# Altium PCB uTCA_MCH_PCB1_template.PcbDoc
Units mm, origin at the board's own origin, x right, y up, seen from the top; angles counter-clockwise.
Board outline 182.75 x 75.8 mm, 2 copper layers (Top Layer, Bottom Layer); 6 components, 0 nets, 302 pads, 0 vias.
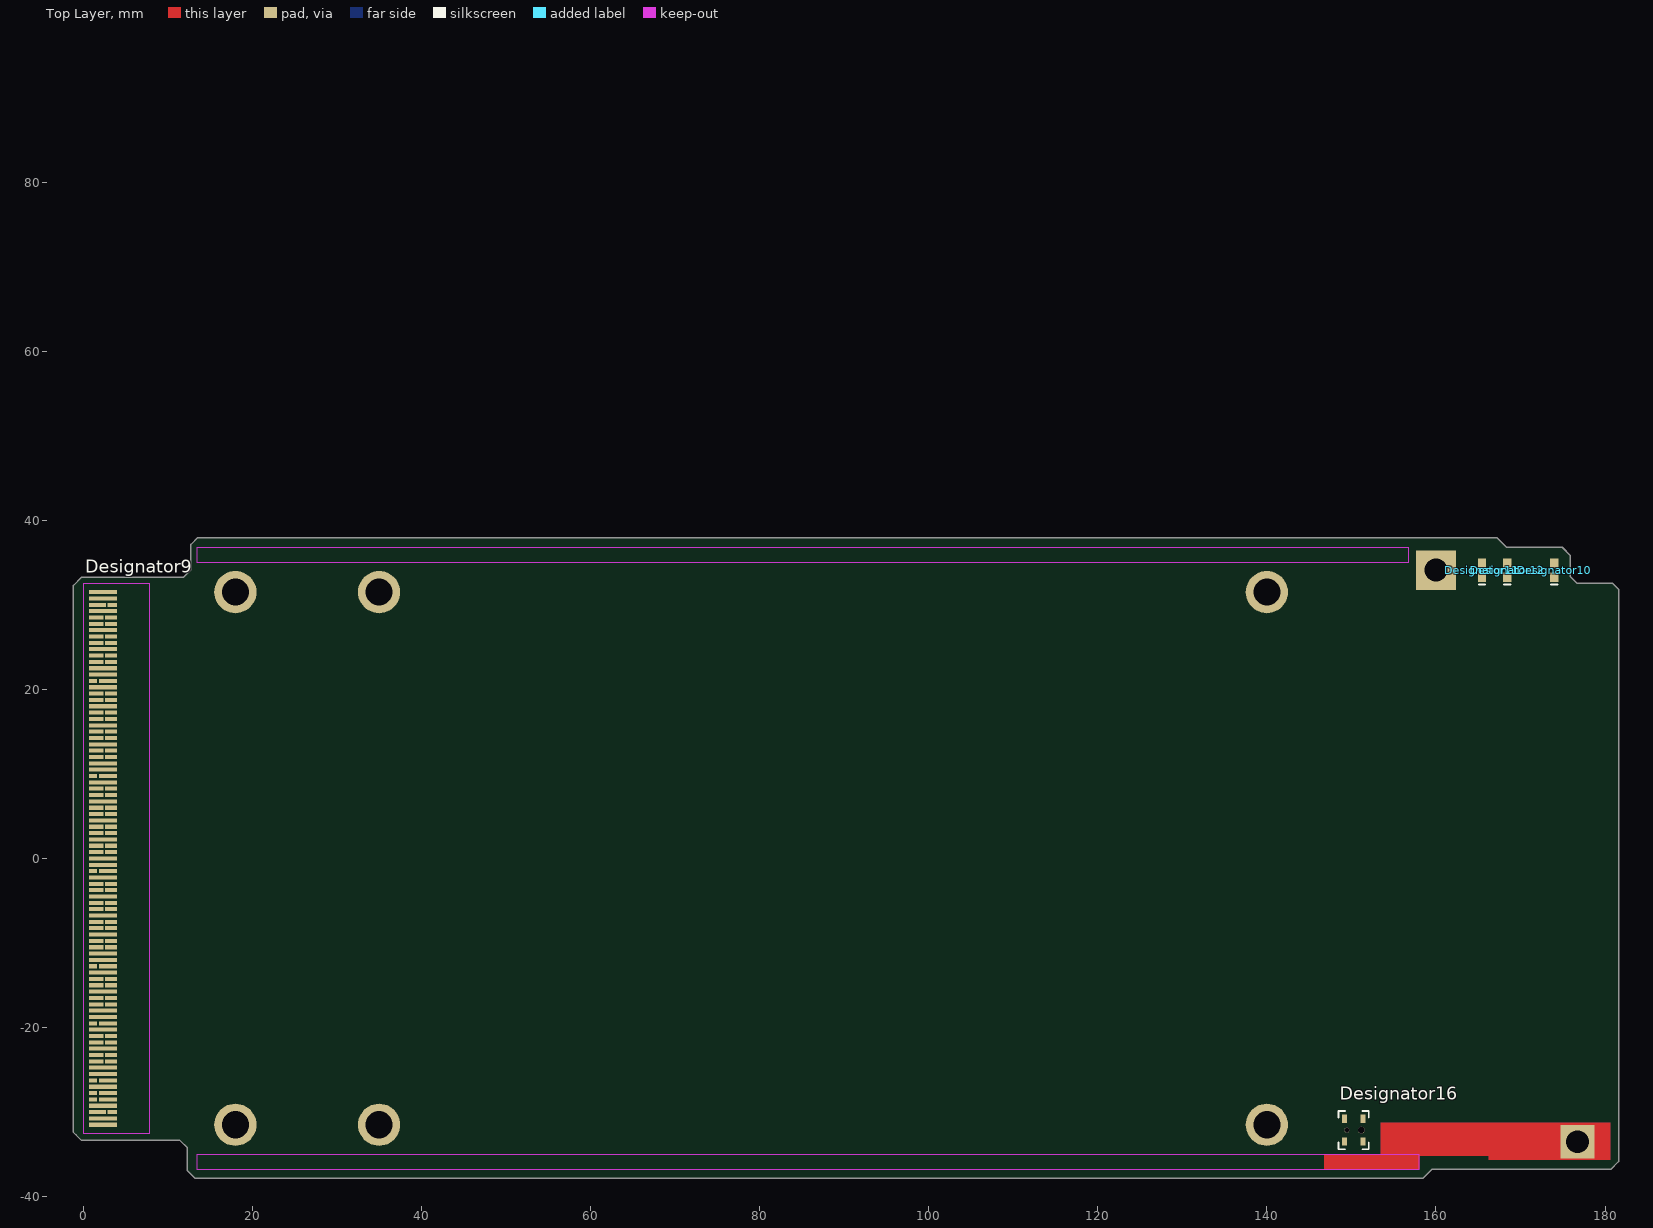
[diagram p0: Top Layer view]
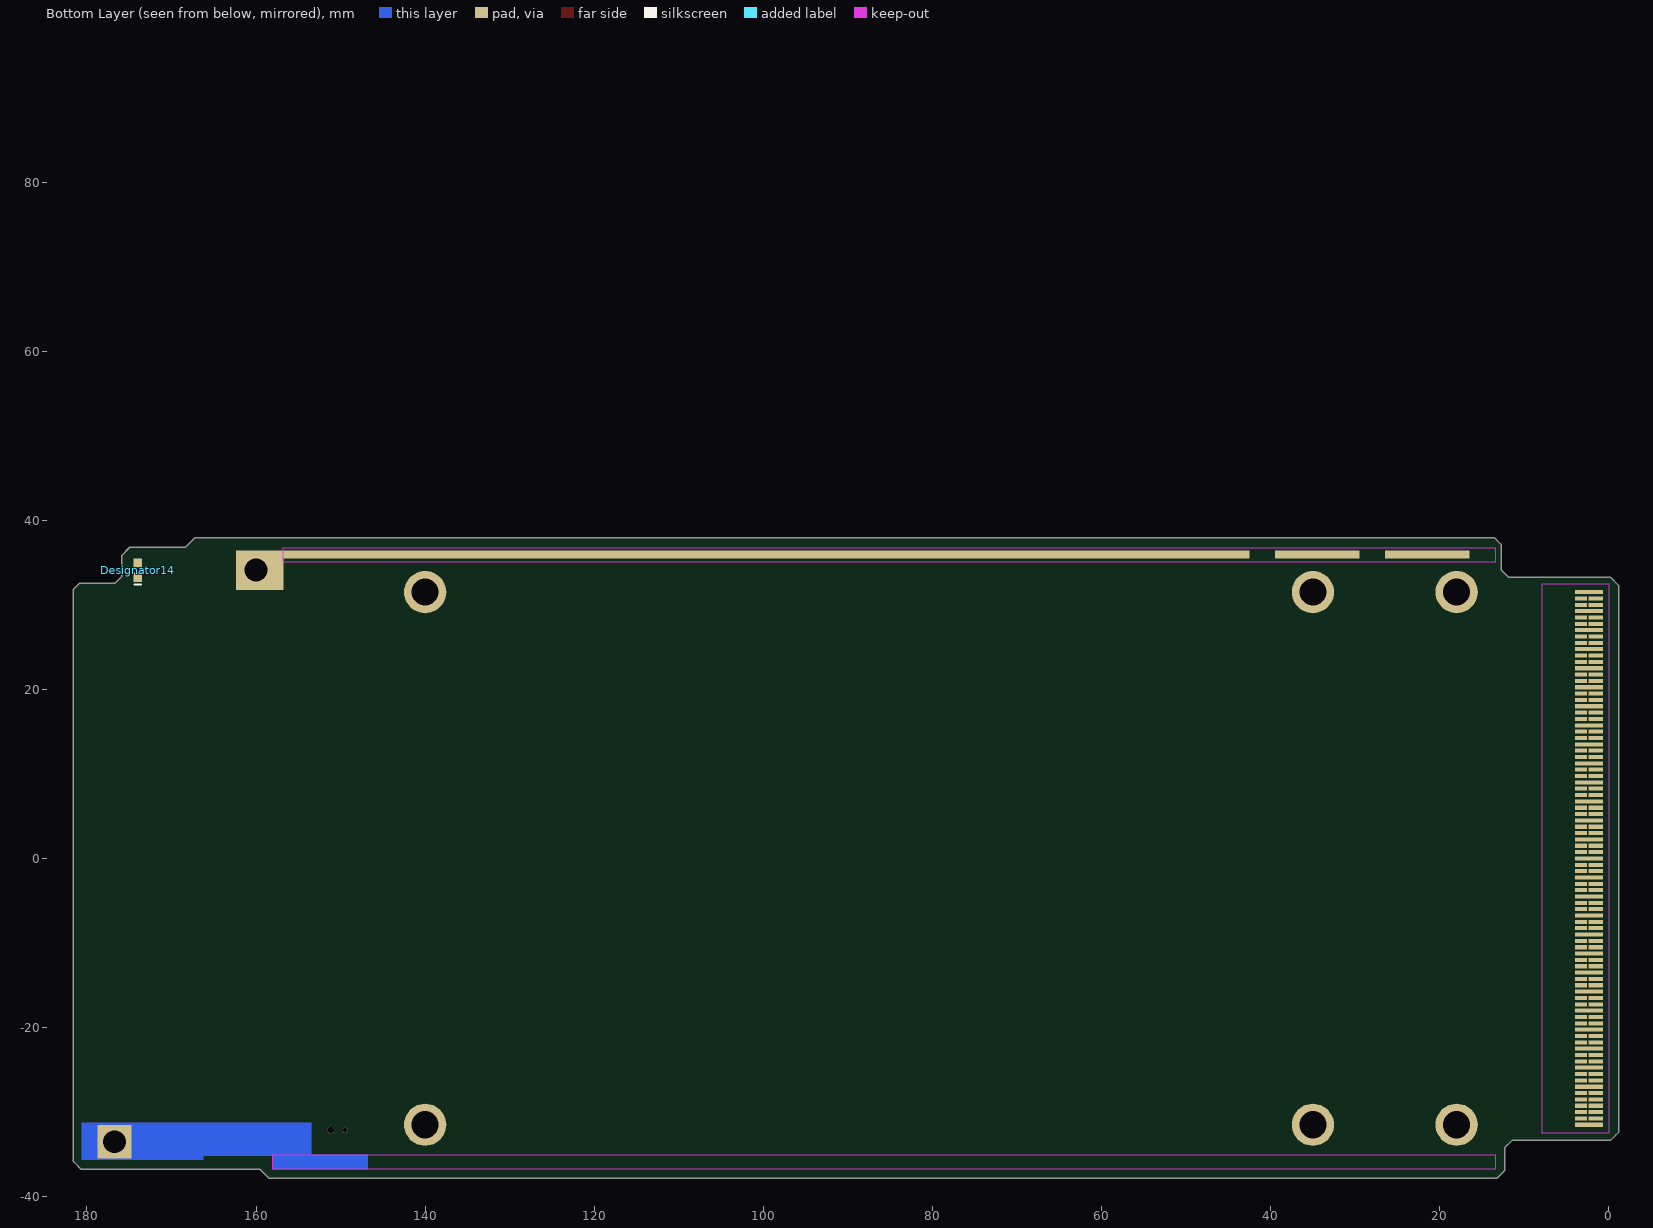
[diagram p1: Bottom Layer view, seen from below]

## Layer stack, top to bottom
Top Layer: signal copper 0.0356
Dielectric: dielectric 0.32, FR-4, Dk 4.8
Bottom Layer: signal copper 0.0356

## Board outline
-1.15,32.3 -0.2,33.25 11.6,33.25 11.85,33.25 12.75,34.15 12.75,37.15 13.55,37.95 167.2,37.95 168.35,36.8 174.95,36.8 175.9,35.85 175.9,33.35 176.7,32.55 180.9,32.55 181.6,31.85 181.6,-35.85 180.7,-36.75 159.55,-36.75 158.45,-37.85 13.25,-37.85 12.3,-36.9 12.3,-34.2 11.45,-33.35 -0.2,-33.35 -0.85,-32.7 -1.15,-32.4 -1.15,32.3

## Design rules (kind name [scope] priority, off if disabled: settings)
Clearance [All] p1: gap=0.254
HoleSize [All] p1: absolutevalues=TRUE maxlimit=3 minlimit=0.025 maxpercent=80.000 minpercent=20.000
PolygonConnect [All] p1: connectstyle=Relief reliefconductorwidth=0.254 reliefentries=4 polygonreliefangle="90 Angle"
RoutingVias [All] p1: holewidth=0.711 width=1.27 viastyle="Through Hole" minholewidth=0.711 minwidth=1.27 maxholewidth=0.711 maxwidth=1.27
SolderMaskExpansion [All] p1: expansion=0.102
TestPointUsage [All] p1: valid=0 allowmultiple=FALSE
Testpoint [All] p1: side=15 testpointundercomponent=TRUE minsize=1.016 maxsize=2.54 preferedsize=1.524 minholesize=0 maxholesize=1.016 preferedholesize=0.813 testpointgrid=0.025 style=1023 order=0123456789
Width [All] p1: maxlimit=0.254 minlimit=0.254 preferedwidth=0.254
18 further rules are at their usual default settings.

## Components (designator, comment, footprint, x,y, rotation, side; value= is the part's Value field where it differs from the comment)
Designator9 "Comment" utca_mch_tongue1 0,0 r0 top locked
Designator10 "Comment" CD1608-0603 173.98,34.1 r270 top locked
Designator11 "Comment" CD1608-0603 165.45,34.1 r270 top locked
Designator12 "Comment" CD1608-0603 168.45,34.1 r270 top locked
Designator14 "Comment" CD1608-0603 173.98,34.098 r270 bottom locked
Designator16 "Comment" uTCA_HOTSWAP_SWITCH 148.87,-30.28 r0 top locked

## Footprints (in the part's own frame and the unit in brackets; to place one, negate y for a bottom-side part, rotate by r counter-clockwise, add the part's x,y. Pads: shape width x height; smd on the part's side, far side on the other; paste and mask are expansions set on the pad)
CD1608-0603 [mm] "Chip Diode; Body 1.6 x 0.8 mm (LxW typ)"
  rect 1.1x1 smd: 1(-0.85,0) 2(0.85,0)
  silkscreen extent 1.7,-0.4 1.7,0.4
uTCA_HOTSWAP_SWITCH [mm]
  rect 0.6x1 smd: A(0.3,-0.5) B(0.3,-3.2) C(2.5,-0.5) D(2.5,-3.2)
  round 0.6 hole 0.6 unplated: ""(0.6,-1.85)
  round 0.8 hole 0.8 unplated: ""(2.3,-1.85)
  silkscreen extent -0.4,-4.1 3.2,0.4
utca_mch_tongue1 [mm] "uTCA MTCA.0 MCH tongue connector"
  rect 3.3x0.48 smd: 1(2.35,-31.5) 2(2.35,-30.75) 4(2.35,-29.25) 7(2.35,-27) 9(2.35,-25.5) 10(2.35,-24.75) 13(2.35,-22.5) 16(2.35,-20.25) 18(2.35,-18.75) 19(2.35,-18) 22(2.35,-15.75) 25(2.35,-13.5) 27(2.35,-12) 28(2.35,-11.25) 31(2.35,-9) 34(2.35,-6.75) 37(2.35,-4.5) 40(2.35,-2.25) 42(2.35,-0.75) 43(2.35,0) 46(2.35,2.25) 49(2.35,4.5) 52(2.35,6.75) 55(2.35,9) 57(2.35,10.5) 58(2.35,11.25) 61(2.35,13.5) 64(2.35,15.75) 67(2.35,18) 70(2.35,20.25) 72(2.35,21.75) 73(2.35,22.5) 76(2.35,24.75) 79(2.35,27) 82(2.35,29.25) 84(2.35,30.75) 85(2.35,31.5)
  rect 0.95x0.48 smd: 2mate(1.175,-19.5) 2mate(1.175,-12.75) 2mate(1.175,-1.5) 2mate(1.175,9.75) 2mate(1.175,21) 2mate(1.175,-28.5) 2mate(1.175,-27.75) 2mate(1.175,-26.25)
  rect 1.1x0.48 smd: 3(3.45,-30) 83(3.45,30)
  rect 1.7x0.48 smd: 3mate(1.55,-24) 3mate(1.55,-23.25) 3mate(1.55,-21.75) 3mate(1.55,-21) 3mate(1.55,-17.25) 3mate(1.55,-16.5) 3mate(1.55,-15) 3mate(1.55,-14.25) 3mate(1.55,-10.5) 3mate(1.55,-9.75) 3mate(1.55,-8.25) 3mate(1.55,-7.5) 3mate(1.55,-6) 3mate(1.55,-5.25) 3mate(1.55,-3.75) 3mate(1.55,-3) 3mate(1.55,0.75) 3mate(1.55,1.5) 3mate(1.55,3) 3mate(1.55,3.75) 3mate(1.55,5.25) 3mate(1.55,6) 3mate(1.55,7.5) 3mate(1.55,8.25) 3mate(1.55,12) 3mate(1.55,12.75) 3mate(1.55,14.25) 3mate(1.55,15) 3mate(1.55,16.5) 3mate(1.55,17.25) 3mate(1.55,18.75) 3mate(1.55,19.5) 3mate(1.55,23.25) 3mate(1.55,24) 3mate(1.55,25.5) 3mate(1.55,26.25) 3mate(1.55,27.75) 3mate(1.55,28.5)
  rect 1.7x0.48 smd far side: 3mate(1.55,-30.75) 3mate(1.55,-30) 3mate(1.55,-29.25) 3mate(1.55,-28.5) 3mate(1.55,-27.75) 3mate(1.55,-26.25) 3mate(1.55,-25.5) 3mate(1.55,-24) 3mate(1.55,-23.25) 3mate(1.55,-21.75) 3mate(1.55,-21) 3mate(1.55,-19.5) 3mate(1.55,-18.75) 3mate(1.55,-17.25) 3mate(1.55,-16.5) 3mate(1.55,-15) 3mate(1.55,-14.25) 3mate(1.55,-12.75) 3mate(1.55,-12) 3mate(1.55,-10.5) 3mate(1.55,-9.75) 3mate(1.55,-8.25) 3mate(1.55,-7.5) 3mate(1.55,-6) 3mate(1.55,-5.25) 3mate(1.55,-3.75) 3mate(1.55,-3) 3mate(1.55,-1.5) 3mate(1.55,-0.75) 3mate(1.55,0.75) 3mate(1.55,1.5) 3mate(1.55,3) 3mate(1.55,3.75) 3mate(1.55,5.25) 3mate(1.55,6) 3mate(1.55,7.5) 3mate(1.55,8.25) 3mate(1.55,9.75) 3mate(1.55,10.5) 3mate(1.55,12) 3mate(1.55,12.75) 3mate(1.55,14.25) 3mate(1.55,15) 3mate(1.55,16.5) 3mate(1.55,17.25) 3mate(1.55,18.75) 3mate(1.55,19.5) 3mate(1.55,21) 3mate(1.55,21.75) 3mate(1.55,23.25) 3mate(1.55,24) 3mate(1.55,25.5) 3mate(1.55,26.25) 3mate(1.55,27.75) 3mate(1.55,28.5) 3mate(1.55,30) 3mate(1.55,30.75)
  rect 2.15x0.48 smd: 5(2.925,-28.5) 6(2.925,-27.75) 8(2.925,-26.25) 17(2.925,-19.5) 26(2.925,-12.75) 41(2.925,-1.5) 56(2.925,9.75) 71(2.925,21)
  rect 1.4x0.48 smd: 11(3.3,-24) 12(3.3,-23.25) 14(3.3,-21.75) 15(3.3,-21) 20(3.3,-17.25) 21(3.3,-16.5) 23(3.3,-15) 24(3.3,-14.25) 29(3.3,-10.5) 30(3.3,-9.75) 32(3.3,-8.25) 33(3.3,-7.5) 35(3.3,-6) 36(3.3,-5.25) 38(3.3,-3.75) 39(3.3,-3) 44(3.3,0.75) 45(3.3,1.5) 47(3.3,3) 48(3.3,3.75) 50(3.3,5.25) 51(3.3,6) 53(3.3,7.5) 54(3.3,8.25) 59(3.3,12) 60(3.3,12.75) 62(3.3,14.25) 63(3.3,15) 65(3.3,16.5) 66(3.3,17.25) 68(3.3,18.75) 69(3.3,19.5) 74(3.3,23.25) 75(3.3,24) 77(3.3,25.5) 78(3.3,26.25) 80(3.3,27.75) 81(3.3,28.5)
  rect 3.3x0.48 smd far side: 86(2.35,31.5) 89(2.35,29.25) 92(2.35,27) 95(2.35,24.75) 98(2.35,22.5) 101(2.35,20.25) 104(2.35,18) 107(2.35,15.75) 110(2.35,13.5) 113(2.35,11.25) 116(2.35,9) 119(2.35,6.75) 122(2.35,4.5) 125(2.35,2.25) 128(2.35,0) 131(2.35,-2.25) 134(2.35,-4.5) 137(2.35,-6.75) 140(2.35,-9) 143(2.35,-11.25) 146(2.35,-13.5) 149(2.35,-15.75) 152(2.35,-18) 155(2.35,-20.25) 158(2.35,-22.5) 161(2.35,-24.75) 164(2.35,-27) 170(2.35,-31.5)
  rect 1.4x0.48 smd far side: 87(3.3,30.75) 88(3.3,30) 90(3.3,28.5) 91(3.3,27.75) 93(3.3,26.25) 94(3.3,25.5) 96(3.3,24) 97(3.3,23.25) 99(3.3,21.75) 100(3.3,21) 102(3.3,19.5) 103(3.3,18.75) 105(3.3,17.25) 106(3.3,16.5) 108(3.3,15) 109(3.3,14.25) 111(3.3,12.75) 112(3.3,12) 114(3.3,10.5) 115(3.3,9.75) 117(3.3,8.25) 118(3.3,7.5) 120(3.3,6) 121(3.3,5.25) 123(3.3,3.75) 124(3.3,3) 126(3.3,1.5) 127(3.3,0.75) 129(3.3,-0.75) 130(3.3,-1.5) 132(3.3,-3) 133(3.3,-3.75) 135(3.3,-5.25) 136(3.3,-6) 138(3.3,-7.5) 139(3.3,-8.25) 141(3.3,-9.75) 142(3.3,-10.5) 144(3.3,-12) 145(3.3,-12.75) 147(3.3,-14.25) 148(3.3,-15) 150(3.3,-16.5) 151(3.3,-17.25) 153(3.3,-18.75) 154(3.3,-19.5) 156(3.3,-21) 157(3.3,-21.75) 159(3.3,-23.25) 160(3.3,-24) 162(3.3,-25.5) 163(3.3,-26.25) 165(3.3,-27.75) 166(3.3,-28.5) 167(3.3,-29.25) 168(3.3,-30) 169(3.3,-30.75)
  rect 1.4x0.48 on Bottom Solder: 138(3.3,-7.5)
  rect 2x0.48 smd: lmate(1.7,30) lmate(1.7,-30)
  Keep-Out Layer region: 0,-32.5 7.9,-32.5 7.9,32.5 0,32.5

## Free pads (board coordinates)
  rect 10x1 smd far side: ESD_STRIP_SEGMENT_1(21.5,35.95) ESD_STRIP_SEGMENT_2(34.5,35.95)
  rect 119x1 smd far side: ESD_STRIP_SEGMENT_3(102,35.95)
  rect 1x4.7 smd far side: ESD_STRIP_SEGMENT_3(157.25,34.1)
  rect 4.7x4.7 hole 2.7: ESD_STRIP_SEGMENT_3(160,34.1)
  round 5 hole 3.2 unplated: ""(18,-31.5) ""(18,31.5) ""(35,-31.5) ""(35,31.5) ""(140,-31.5) ""(140,31.5)
  rect 4x4 hole 2.7: ""(176.75,-33.5)

## Nets (pads, with @x,y where several pads share a name; then routed paths per layer and width w, separated by ;. In a path a pad name is that pad's centre, name@x,y a point inside that pad or via, vN(x,y) a via of type N, cw(c..) or ccw(c..) an arc to the next point about the centre after c; other vN are vias at no path point)
pads on no net: Designator9.1 Designator9.2 Designator9.2mate Designator9.3 Designator9.3mate Designator9.4 Designator9.5 Designator9.6 Designator9.7 Designator9.8 Designator9.9 Designator9.10 Designator9.11 Designator9.12 Designator9.13 Designator9.14 Designator9.15 Designator9.16 Designator9.17 Designator9.18 Designator9.19 Designator9.20 Designator9.21 Designator9.22 Designator9.23 Designator9.24 Designator9.25 Designator9.26 Designator9.27 Designator9.28 Designator9.29 Designator9.30 Designator9.31 Designator9.32 Designator9.33 Designator9.34 Designator9.35 Designator9.36 Designator9.37 Designator9.38 Designator9.39 Designator9.40 Designator9.41 Designator9.42 Designator9.43 Designator9.44 Designator9.45 Designator9.46 Designator9.47 Designator9.48 Designator9.49 Designator9.50 Designator9.51 Designator9.52 Designator9.53 Designator9.54 Designator9.55 Designator9.56 Designator9.57 Designator9.58 Designator9.59 Designator9.60 Designator9.61 Designator9.62 Designator9.63 Designator9.64 Designator9.65 Designator9.66 Designator9.67 Designator9.68 Designator9.69 Designator9.70 Designator9.71 Designator9.72 Designator9.73 Designator9.74 Designator9.75 Designator9.76 Designator9.77 Designator9.78 Designator9.79 Designator9.80 Designator9.81 Designator9.82 Designator9.83 Designator9.84 Designator9.85 Designator9.86 Designator9.87 Designator9.88 Designator9.89 Designator9.90 Designator9.91 Designator9.92 Designator9.93 Designator9.94 Designator9.95 Designator9.96 Designator9.97 Designator9.98 Designator9.99 Designator9.100 Designator9.101 Designator9.102 Designator9.103 Designator9.104 Designator9.105 Designator9.106 Designator9.107 Designator9.108 Designator9.109 Designator9.110 Designator9.111 Designator9.112 Designator9.113 Designator9.114 Designator9.115 Designator9.116 Designator9.117 Designator9.118 Designator9.119 Designator9.120 Designator9.121 Designator9.122 Designator9.123 Designator9.124 Designator9.125 Designator9.126 Designator9.127 Designator9.128 Designator9.129 Designator9.130 Designator9.131 Designator9.132 Designator9.133 Designator9.134 Designator9.135 Designator9.136 Designator9.137 Designator9.138 Designator9.139 Designator9.140 Designator9.141 Designator9.142 Designator9.143 Designator9.144 Designator9.145 Designator9.146 Designator9.147 Designator9.148 Designator9.149 Designator9.150 Designator9.151 Designator9.152 Designator9.153 Designator9.154 Designator9.155 Designator9.156 Designator9.157 Designator9.158 Designator9.159 Designator9.160 Designator9.161 Designator9.162 Designator9.163 Designator9.164 Designator9.165 Designator9.166 Designator9.167 Designator9.168 Designator9.169 Designator9.170 Designator9.lmate Designator10.1 Designator10.2 Designator11.1 Designator11.2 Designator12.1 Designator12.2 Designator14.1 Designator14.2 Designator16. Designator16.A Designator16.B Designator16.C Designator16.D

## Keep-outs
Keep-Out Layer:
  rectangle: 13.45,-36.75 158,-35.02
  rectangle: 13.45,35.06 156.76,36.75

## Other copper
Top Layer:
  region: 146.8,-35.05 146.8,-36.75 158,-36.75 158,-35.15 166.25,-35.15 166.25,-35.65 180.6,-35.65 180.6,-31.25 153.5,-31.25 153.5,-35.05
Bottom Layer:
  region: 146.8,-35.05 146.8,-36.75 158,-36.75 158,-35.15 166.25,-35.15 166.25,-35.65 180.6,-35.65 180.6,-31.25 153.5,-31.25 153.5,-35.05

## Silkscreen, mask and mechanical layers (free items; w line width, h text height)
Top Solder:
  rectangle: 156.65,31.65 157.75,36.75
  rectangle: 157.2,36.25 162.45,36.75
  rectangle: 13.45,35.15 157,36.75
  rectangle: 146.75,-36.75 158.05,-35.05
  rectangle: 153.45,-35.7 180.6,-31.2
Mechanical 1:
  lines w0.01: 9.271,-32.5 12.45,-32.5 cw(c12.45,-33.5) 13.45,-33.5 13.45,-36.3 ; 9.55,32.5 12.434,32.5 ; 12.4,32.5 ccw(c12.425,33.525) 13.45,33.5 13.45,36.25 cw(c13.95,36.25) 13.95,36.75 167,36.75 167,35.85 167,35.75 174.6,35.75 174.6,31.55 180.6,31.55 180.6,-35.65 166.25,-35.65 166.25,-35.15 158,-35.15 158,-36.75 13.9,-36.75 ; 13.45,-36.25 ccw(c13.95,-36.25) 13.95,-36.75 ; 165.5,-31.5 165.5,-31.3 165.5,-31.2 158.5,-31.2 158.5,-32.9 165.5,-32.9 165.5,-31.45
Mechanical 15:
  circle w0.01: c6.75,31.5 r0.212
  circle w0.01: c6.75,-31.5 r0.206
  lines w0.01: 6.35,-31.5 7.2,-31.5 ; 6.35,31.5 7.2,31.5 ; 6.75,-31.9 6.75,-31.1 ; 6.75,31.1 6.75,31.9 ; 149.775,-32.132 cw(c149.472,-32.128) 149.775,-32.128 ; 151.573,-32.127 cw(c151.174,-32.127) 151.573,-32.121 ; 158.55,34.1 167,34.1 169.55,34.1 ; 165.45,32.3 165.45,33.6 165.45,34.2 ; 165.45,34.15 165.45,34.65 ; 165.45,34.45 165.45,35.65 ; 168.45,32.3 168.45,33.6 168.45,34.2 ; 168.45,33.4 168.45,34.1 168.45,34.55 ; 168.45,34.15 168.45,34.65 ; 168.45,34.45 168.45,35.65 ; 169.45,34.1 174.6,34.1 ; 173.95,32.3 173.95,33.6 173.95,34.2 ; 173.95,33.4 173.95,34.1 173.95,34.55 ; 173.95,34.15 173.95,34.65 ; 173.95,34.45 173.95,35.65 ; 174.6,34.1 174.6,32.3 173.3,32.3 173.3,35.65 174.6,35.65 174.6,34.1 ; 146.8,-35.05 146.8,-29.3 153.45,-29.3 153.5,-29.3 153.5,-35.05 146.8,-35.05 ; 162.45,31.75 174.6,31.75 174.6,35.75 167,35.75 167,36.45 162.45,36.45 162.45,31.75 ; 164.8,32.3 166.1,32.3 166.1,34.1 166.1,35.65 164.8,35.65 164.8,32.3 ; 167.8,32.3 167.8,35.65 169.1,35.65 169.1,34.1 169.1,32.3 167.8,32.3
  text "MCH PCB1" at 61.55,-6.9 h10
  text "Edge connector markings" at 9.95,-32.1 h0.7